# Altium PCB GPS_Proj.PcbDoc (part 1 of 2)
Units mil, origin at the board's own origin, x right, y up, seen from the top; angles counter-clockwise.
Board outline 1417.32 x 6305 mil, 4 copper layers (Top Layer, GND, VCC, Bottom Layer); 115 components, 144 nets, 456 pads, 265 vias.
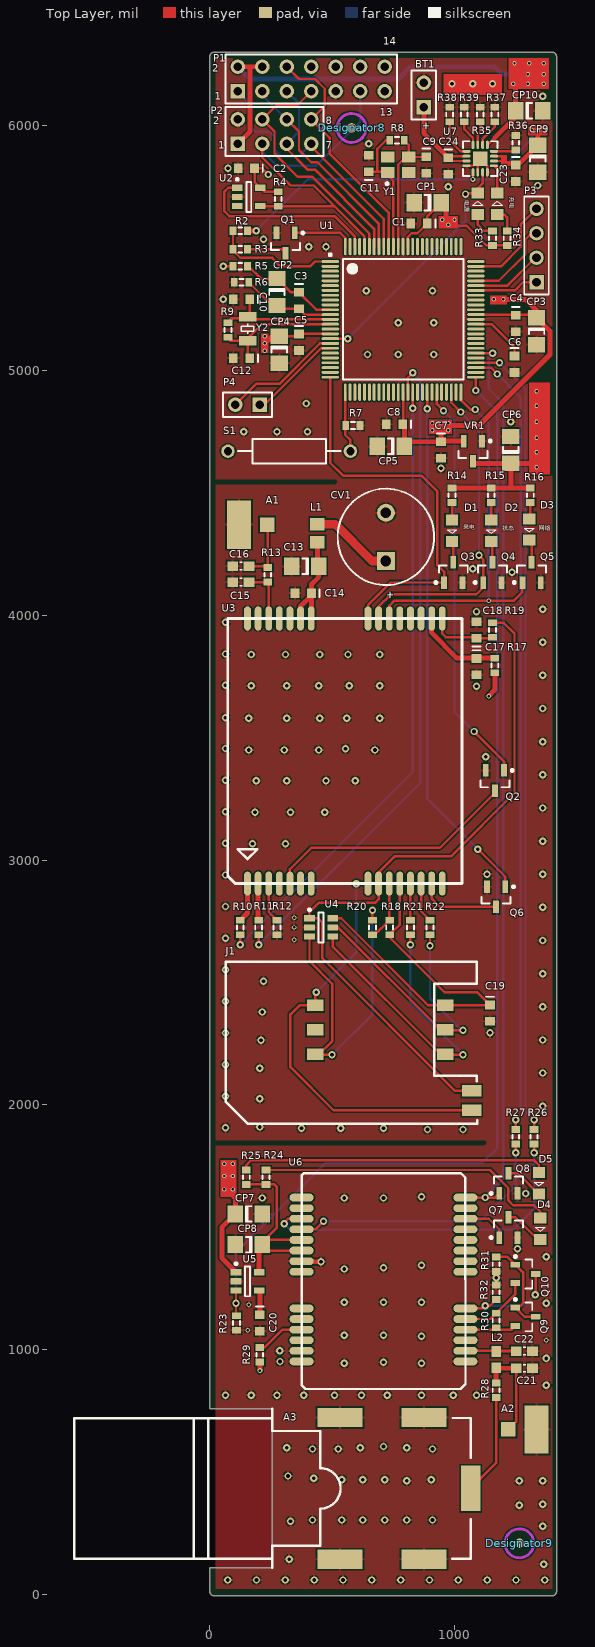
[diagram p0: Top Layer view]
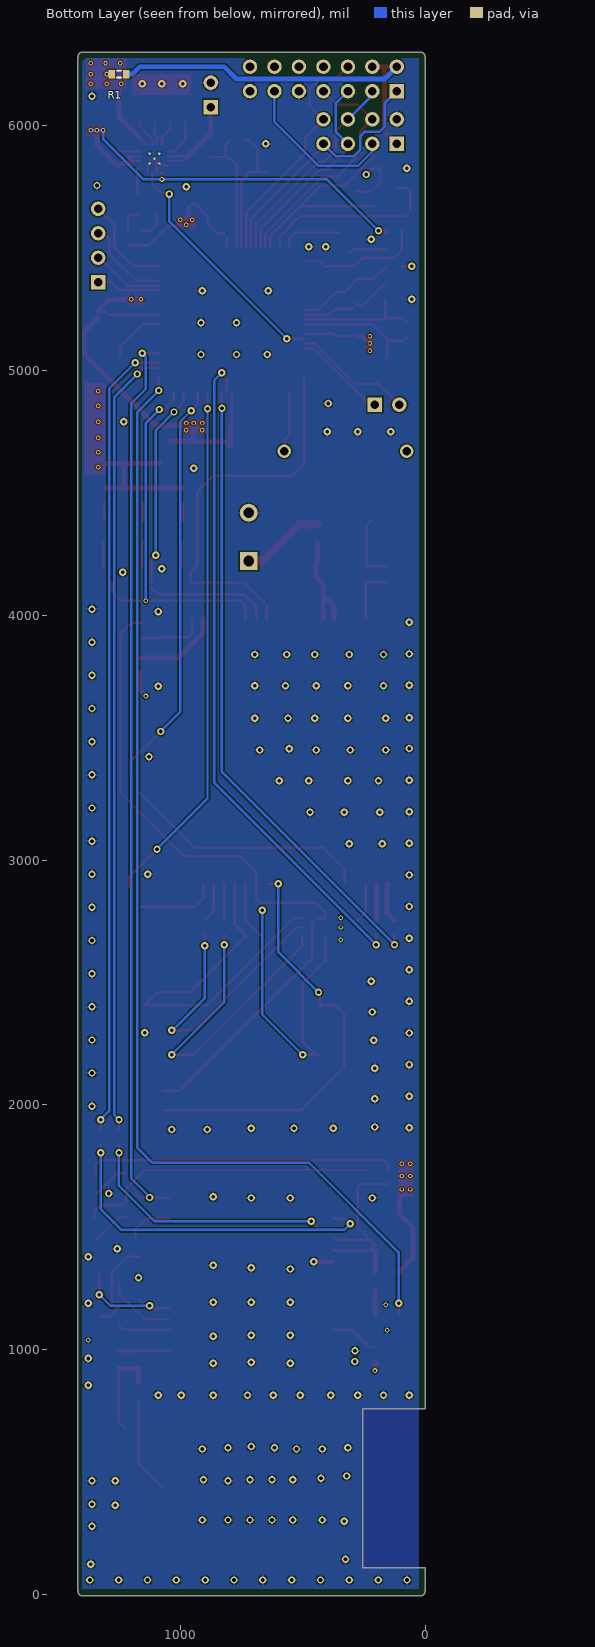
[diagram p1: Bottom Layer view, seen from below]
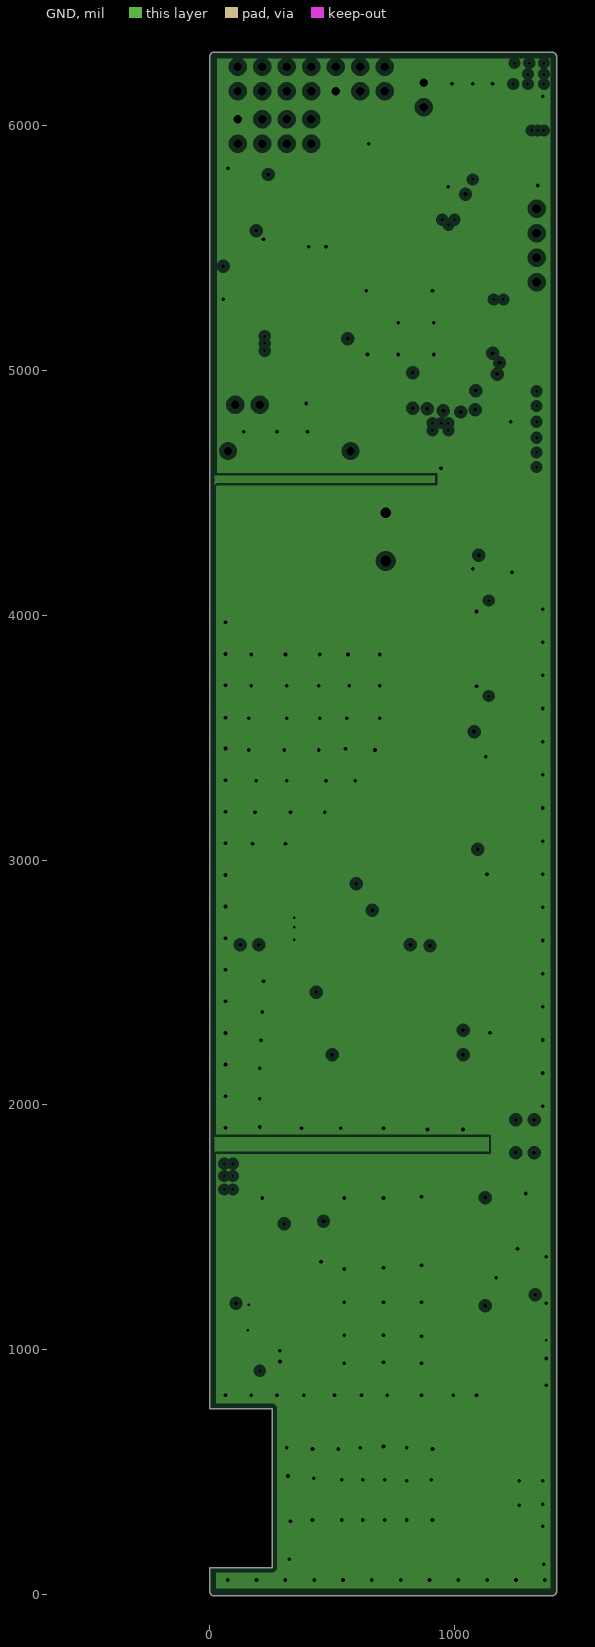
[diagram p2: GND, clearances drawn from the general rule]
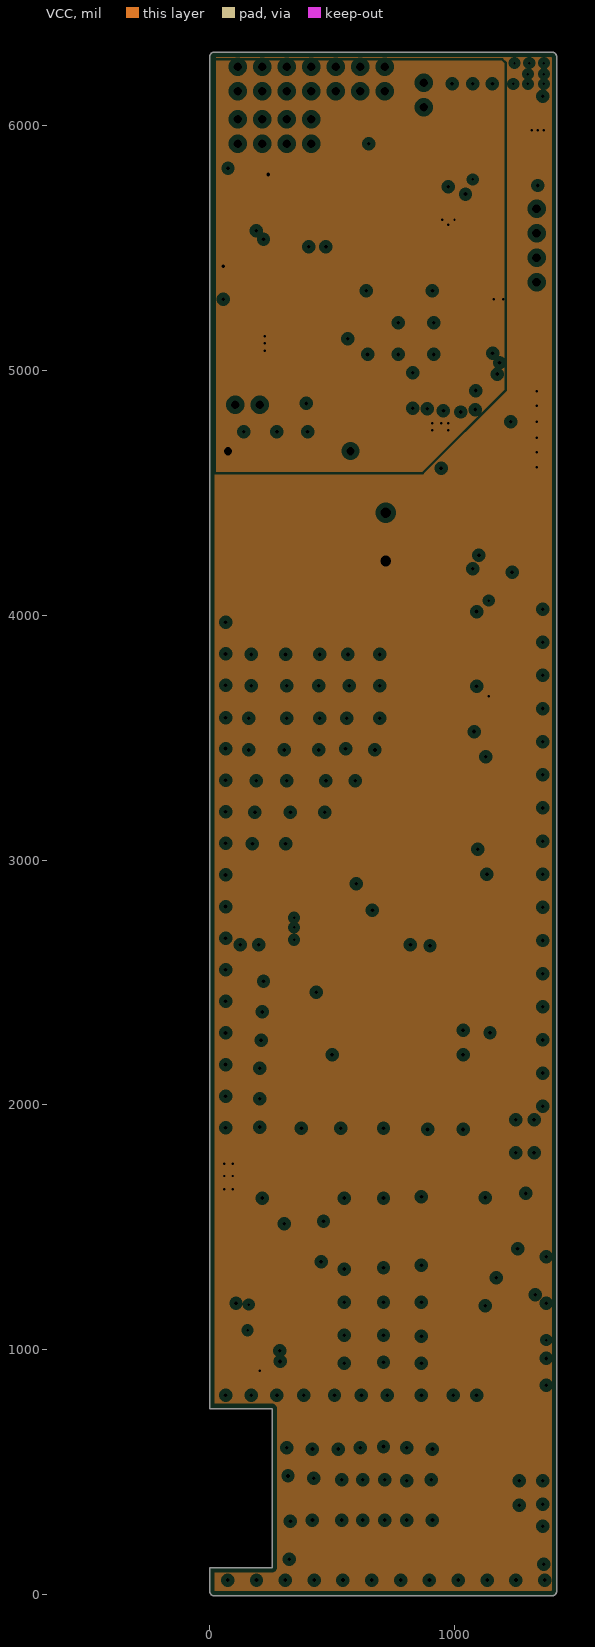
[diagram p3: VCC, clearances drawn from the general rule]
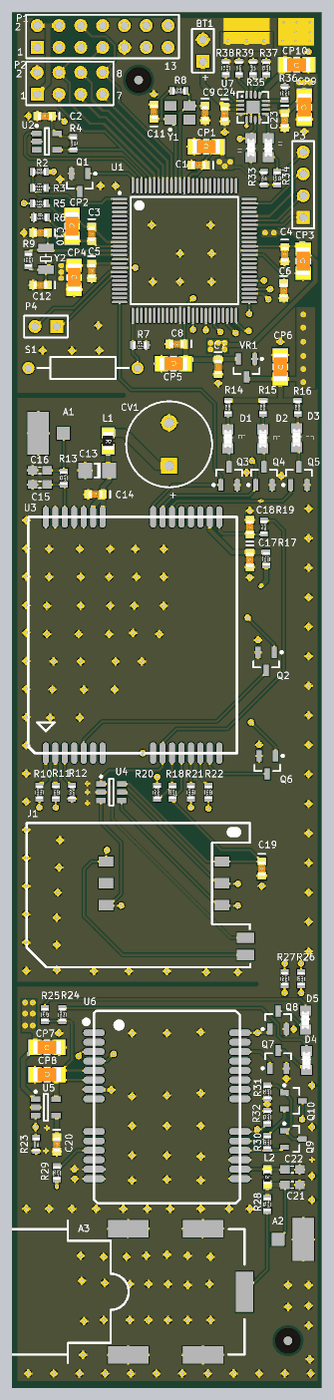
[diagram p5: 3D render of the assembled board from above, using the file's embedded part models]

## Layer stack, top to bottom
Top Layer: signal copper 1.4
Dielectric: core 12.6, FR-4, Dk 4.8
GND: plane copper 1.4, net GGND
Dielectric: prepreg 12.6, FR-4, Dk 4.8
VCC: plane copper 1.4, net (Multiple Nets)
Dielectric: core 12.6, FR-4, Dk 4.8
Bottom Layer: signal copper 1.4

## Board outline
0,15 0,110 255,110 255,760 0,760 0,6280 cw(c20,6280) 20,6300 1397.32,6300 cw(c1397.32,6280) 1417.32,6280 1417.32,15 cw(c1397.32,15) 1397.32,-5 20,-5 cw(c20,15)

## Design rules (kind name [scope] priority, off if disabled: settings)
Clearance [All] p1: gap=6
PlaneClearance [All] p1: clearance=20
PlaneConnect PlaneConnect_VAI [IsVIA] p1: planeconnectstyle=Direct reliefexpansion=20 reliefentries=4 reliefconductorwidth=10 reliefairgap=10
PlaneConnect [All] p2: planeconnectstyle=Relief reliefexpansion=20 reliefentries=4 reliefconductorwidth=10 reliefairgap=10
PolygonConnect [All] p1: connectstyle=Relief reliefconductorwidth=10 reliefentries=4 polygonreliefangle="90 Angle"
RoomDefinition 12-MSP430 [InComponentClass('12-MSP430')] p1: confinementstyle=ConfineIn formatcopy=TRUE lockcomponents=FALSE outline 5,4570 1417.32,4570 1417.32,6315 5,6315
RoomDefinition "BAT POWER" [InComponentClass('BAT POWER')] p2: confinementstyle=ConfineIn formatcopy=TRUE lockcomponents=FALSE outline 835,5420 1425,5420 1425,6300 835,6300
RoomDefinition 14-GPS [InComponentClass('14-GPS')] p3: confinementstyle=ConfineIn formatcopy=TRUE lockcomponents=FALSE outline -6.97,75 1420,75 1420,1806.69 -6.97,1806.69
RoomDefinition 13-GPRS [InComponentClass('13-GPRS')] p4: confinementstyle=ConfineIn formatcopy=TRUE lockcomponents=FALSE outline 2.32,1878.35 1417.32,1878.35 1417.32,4540 2.32,4540
RoutingVias [All] p1: holewidth=28 width=50 viastyle="Through Hole" minholewidth=10 minwidth=18 maxholewidth=28 maxwidth=50
SilkscreenOverComponentPads [All] p1: minsilkscreentomaskgap=10
SolderMaskExpansion [All] p1: expansion=4
Width [All] p1: maxlimit=100 minlimit=6 preferedwidth=20
25 further rules are at their usual default settings.

## Classes and differential pairs
component class "BAT POWER": BT1 C23 C24 CP9 CP10 R33 R34 R35 R36 R37 R38 R39 U7 充电 电源
component class 14-GPS: A2 A3 C20 C21 C22 CP7 CP8 D4 D5 L2 Q7 Q8 Q9 Q10 R23 R24 R25 R26 R27 R28 R29 R30 R31 R33 U5 U6
component class 13-GPRS: A1 C13 C14 C15 C16 C17 C18 C19 CV1 D1 D2 D3 J1 L1 Q2 Q3 Q4 Q5 Q6 R11 R12 R13 R14 R15 R16 R17 R18 R19 R20 R21 R22 R27 U3 U4
component class 12-MSP430: C1 C2 C3 C4 C5 C6 C7 C8 C9 C10 C11 C12 CP1 CP2 CP3 CP4 CP5 CP6 P1 P2 P3 P4 Q1 R2 R3 R4 R5 R6 R7 R8 R11 R27 S1 TP1 U1 U2 VR1 Y1 Y2

## Components (designator, comment, footprint, x,y, rotation, side; value= is the part's Value field where it differs from the comment)
A1 "Antenna" PIN1 235,4370 r270 top
A2 "Antenna" PIN1 1220,675 r90 top
A3 "Antenna" SL1206 255,200 r180 top
BT1 "Battery" BAT-2 875,6125 r90 top
C1 "0.1uF" 1608[0603] 855,5600 r180 top
C2 "0.1uF" 1608[0603] 150,5825 r180 top
C3 "0.1uF" 1608[0603] 365,5285 r270 top
C4 "0.1uF" 1608[0603] 1250,5191.54 r270 top
C5 "0.1uF" 1608[0603] 365,5115 r270 top
C6 "470nF" 1608[0603] 1245,5025 r270 top
C7 "0.1uF" 1608[0603] 945,4675 r270 top
C8 "0.1uF" 1608[0603] 755,4780 r180 top
C9 "15pF" 1608[0603] 885,5838.46 r270 top
C10 "15pF" 1608[0603] 130,5290 r180 top
C11 "15pF" 1608[0603] 650,5845 r90 top
C12 "15pF" 1608[0603] 130,5050 r180 top
C13 "" 1206C 390,4200 r90 top
C14 "0.1uF" 1608[0603] 382.32,4090.47 r180 top
C15 "Cap" 0603 127.32,4135.47 r270 top
C16 "Cap" 0603 127.32,4200.47 r270 top
C17 "0.1uF" 1608[0603] 1090,3790 r270 top
C18 "0.1uF" 1608[0603] 1090,3940 r90 top
C19 "0.1uF" 1608[0603] 1145,2375 r270 top
C20 "0.1uF" 1608[0603] 205,1110 r270 top
C21 "Cap" 0603 1285,925 r90 top
C22 "Cap" 0603 1285,995 r90 top
C23 "0.1uF" 1608[0603] 1250,5805 r270 top
C24 "0.1uF" 1608[0603] 975,5835 r270 top
CP1 "10uF/16V" 3216[1206] 890,5685 r180 top
CP2 "10uF/16V" 3216[1206] 275,5320 r270 top
CP3 "10uF/16V" 3216[1206] 1335,5160 r270 top
CP4 "10uF/16V" 3216[1206] 285,5085 r270 top
CP5 "10uF/16V" 3216[1206] 740,4690 r180 top
CP6 "10uF/16V" 3216[1206] 1230,4675 r90 top
CP7 "10uF/16V" 3216[1206] 160,1555 r0 top
CP8 "10uF/16V" 3216[1206] 160,1430 r180 top
CP9 "10uF/16V" 3216[1206] 1340,5865 r270 top
CP10 "10uF/16V" 3216[1206] 1305,6060 r0 top
CV1 "2200uF/10V" CAPPR5-10x20/H1.1 720,4320 r90 top
D1 "LED2" LED0805 990,4345 r270 top
D2 "LED2" LED0805 1150,4345 r270 top
D3 "LED2" LED0805 1305,4350 r270 top
D4 "LED2" LED0805 1350,1495 r270 top
D5 "LED2" LED0805 1345,1680 r270 top
Designator8 "Comment" Mark 580,5990 r180 top
Designator9 "Comment" Mark 1265,210 r180 top
J1 "MUP-C745" MUP-C745 962.32,2407.01 r270 top
L1 "Inductor" 2012[0805] 440,4335 r270 top
L2 "Inductor" 0603RT 1170,960 r90 top
P1 "Header 7X2" HDR2X7 115,6140 r0 top
P2 "Header 4X2" HDR2X4 115,5925 r0 top
P3 "Header 4" HDR1X4 1335,5360 r90 top
P4 "Header 2" HDR1X2 205,4860 r180 top
Q1 "PDTC143ET" SOT23_N 310,5520 r270 top
Q2 "PDTC143ET" SOT23_N 1165,3325 r270 top
Q3 "PDTC143ET" SOT23_N 995,4175 r90 top
Q4 "PDTC143ET" SOT23_N 1155,4175 r90 top
Q5 "PDTC143ET" SOT23_N 1315,4175 r90 top
Q6 "PDTC143ET" SOT23_N 1170,2850 r270 top
Q7 "PDTC143ET" SOT23_N 1220,1500 r90 top
Q8 "PDTC143ET" SOT23_N 1220,1680 r90 top
Q9 "MMBT3096" SOT23-PNP 1290,1135 r270 top
Q10 "MMBT3096" SOT23-PNP 1290,1310 r270 top
R1 "0R" 0603R 1250,6210 r180 bottom
R2 "100K" 0603R 125,5570 r0 top
R3 "100K" 0603R 125,5495 r180 top
R4 "470K" 0603R 280,5700 r270 top
R5 "0R" 0603R 125,5425 r0 top
R6 "0R" 0603R 130,5360 r0 top
R7 "100K" 0603R 585,4775 r0 top
R8 "10M" 0603R 765,5940 r0 top
R9 "10M" 0603R 75,5165 r90 top
R10 "0R" 0603R 125,2725 r270 top
R11 "0R" 0603R 200,2725 r270 top
R12 "0R" 0603R 275,2725 r90 top
R13 "0R" 0603R 237.32,4165.47 r90 top
R14 "10K" 0603R 990,4490 r90 top
R15 "10K" 0603R 1150,4490 r90 top
R16 "10K" 0603R 1310,4490 r90 top
R17 "1.5K" 0603R 1165,3795 r270 top
R18 "100K" 0603R 735,2725 r90 top
R19 "100K" 0603R 1155,3940 r90 top
R20 "22R" 0603R 665,2725 r90 top
R21 "22R" 0603R 820,2725 r270 top
R22 "22R" 0603R 900,2725 r270 top
R23 "470K" 0603R 110,1110 r270 top
R24 "10K" 0603R 230,1705 r270 top
R25 "10K" 0603R 150,1705 r270 top
R26 "0R" 0603R 1325,1870 r90 top
R27 "0R" 0603R 1250,1870 r90 top
R28 "0R" 0603R 1170,835 r90 top
R29 "0R" 0603R 205,980 r90 top
R30 "10R" 0603R 1170,1120 r90 top
R31 "47K" 0603R 1170,1350 r90 top
R32 "200K" 0603R 1170,1235 r90 top
R33 "10K" 0603R 1155,5540 r270 top
R34 "10K" 0603R 1215,5540 r270 top
R35 "2K" 0603R 1105,6045 r270 top
R36 "1K1" 0603R 1250,5930 r90 top
R37 "51K" 0603R 1165,6045 r90 top
R38 "10K" 0603R 980,6045 r90 top
R39 "680R" 0603R 1040,6045 r90 top
S1 "SW-420" AXIAL-0.5 325,4670 r180 top
U1 "MSP430F5438" TQFP100_N 790,5208.35 r0 top
U2 "MAX6869" SOT23-5BN 160,5708.46 r0 top
U3 "M72-D" M72D 552.32,3445.47 r90 top
U4 "SMF05CT1G" SOT23-6_N 455,2725 r0 top
U5 "LTC1844ES5-3.3" SOT-23-OT5_N 155,1280 r0 top
U6 "EB-5662RE" EB-5662RE 710,1305 r180 top
U7 "BQ24073" BQ24073 1105,5865 r0 top
VR1 "AS1360" SOT23_N 1075,4670 r270 top
Y1 "FA-238" FA-238 770,5840 r0 top
Y2 "FC-135" FC-135 155,5170 r90 top
充电 "LED2" LED0805 1175,5680 r90 top (schematic designator D7)
电源 "LED2" LED0805 1095,5680 r90 top (schematic designator D6)

## Footprints (in the part's own frame and the unit in brackets; to place one, negate y for a bottom-side part, rotate by r counter-clockwise, add the part's x,y. Pads: shape width x height; smd on the part's side, far side on the other; paste and mask are expansions set on the pad)
0603 [mm]
  rect 1x1.1 smd: 1(0,-0.85) 2(0,0.85)
  silkscreen extent -0.38,-0.13 0.38,0.13
0603R [mm]
  rect 0.7x0.9 smd: 1(-0.75,0) 2(0.75,0)
  silkscreen extent -0.2,-0.35 0.2,0.35, body extent -0.77,-0.42 0.78,0.43, height 0.45
0603RT [mm]
  rect 1.1x1 smd: 1(-0.85,0) 2(0.85,0)
  body extent -1.3,-0.5 1.3,0.5, height 0.53
1206C [mm]
  rect 1.8x1.6 smd: 1(0,-1.4) 2(0,1.4)
  silkscreen extent -0.8,-0.3 0.8,0.3
1608[0603] [mm]
  rect 0.9x1 smd: 1(-0.85,0) 2(0.85,0)
  silkscreen extent -1.7,-0.4 -1.7,0.4, body extent -1.3,-0.5 1.3,0.5, height 0.89
2012[0805] [mm]
  rect 1.3x1.5 smd: 1(-0.95,0) 2(0.95,0)
  body extent -1.51,-0.7 1.49,0.7, height 0.53
3216[1206] [mm]
  rect 1.6x1.8 smd: 1(-1.4,0) 2(1.4,0)
  silkscreen extent -0.3,-0.8 0.3,0.8, body extent -2.1,-0.9 2.1,0.9, height 0.95
AXIAL-0.5 [mm] "Axial Device, Thru-Hole; 2 Leads; 0.5 in Pin Spacing"
  round 1.4 hole 0.85: 1(-6.35,0) 2(6.35,0)
  silkscreen extent -5.33,-1.27 5.33,1.27
BAT-2 [mm]
  rect 1.5x1.5 hole 0.9: 1(-1.27,0)
  round 1.5 hole 0.9: 2(1.27,0)
  silkscreen extent -2.54,-1.27 2.54,1.27
BQ24073 [mm]
  oval 0.85x0.3 smd: 1(-1.425,0.75) 2(-1.425,0.25) 3(-1.425,-0.25) 4(-1.425,-0.75) 9(1.425,-0.75) 10(1.425,-0.25) 11(1.425,0.25) 12(1.425,0.75)
  oval 0.3x0.85 smd: 5(-0.75,-1.425) 6(-0.25,-1.425) 7(0.25,-1.425) 8(0.75,-1.425) 13(0.75,1.425) 14(0.25,1.425) 15(-0.25,1.425) 16(-0.75,1.425)
  round 0.25 all layers, no hole: 8(-0.508,-0.508) 8(-0.508,0.508) 8(0,0) 8(0.508,-0.508) 8(0.508,0.508)
  rect 1.5x1.5 smd: 8(0,0)
  round 0.3 on Top Overlay: 12(-1.27,1.27)
  silkscreen extent -1.8,-1.8 1.8,1.8
CAPPR5-10x20/H1.1 [mm] "Capacitor, Electrolytic, Radial; Body 10 x 20 mm (Dia.xH typ); Pin Spacing 5 mm (typ)"
  rect 1.85x1.85 hole 1.1: 1(-2.5,0)
  round 1.85 hole 1.1: 2(2.5,0)
  silkscreen extent -5,-5 5,5
EB-5662RE [mm]
  oval 2.5x0.8 smd: 1(8.5,-8.051) 2(8.5,-6.951) 3(8.5,-5.851) 4(8.5,-4.751) 5(8.5,-3.651) 6(8.5,-2.551) 7(8.5,-1.451) 8(8.5,-0.351) 9(8.5,3.449) 10(8.5,4.549) 11(8.5,5.649) 12(8.5,6.749) 13(8.5,7.849) 14(8.5,8.949) 15(-8.5,8.949) 16(-8.5,7.849) 17(-8.5,6.749) 18(-8.5,5.649) 19(-8.5,4.549) 20(-8.5,3.449) 21(-8.5,-0.351) 22(-8.5,-1.451) 23(-8.5,-2.551) 24(-8.5,-3.651) 25(-8.5,-4.751) 26(-8.5,-5.851) 27(-8.5,-6.951) 28(-8.5,-8.051)
  round 1.3 on Top Overlay: 3(5.588,-8.949)
  round 1 on Top Overlay: ""(9.398,-9.33)
  silkscreen extent -8.51,-10.59 8.5,11.81
FA-238 [mm] "Quartz Crystal, SM; Body 3.4 x 2.7 mm (LxW max)"
  rect 1.4x1.15 smd: 1(-1.1,-0.8) 2(1.1,-0.8) 3(1.1,0.8) 4(-1.1,0.8)
  silkscreen extent -1.27,-2.09 -1.02,-1.84
FC-135 [mm] "Quartz Crystal, SM; 2 Leads; Body 3.5 x 1.5 x 0.8mm (LxWxH)"
  rect 1x1.8 smd: 1(-1.25,0) 2(1.25,0)
  silkscreen extent -0.51,-0.64 0.51,0.64
HDR1X2 [mm] "Connector; Header; 2 Position"
  rect 1.5x1.5 hole 0.9: 1(0,0)
  round 1.5 hole 0.9: 2(2.54,0)
  silkscreen extent -1.27,-1.27 3.81,1.27
HDR1X4 [mm] "Connector; Header; 4 Position"
  rect 1.5x1.5 hole 0.9: 1(0,0)
  round 1.5 hole 0.9: 2(2.54,0) 3(5.08,0) 4(7.62,0)
  silkscreen extent -1.27,-1.27 8.89,1.27
HDR2X4 [mm] "Connector; Header; 4x2 Position"
  rect 1.5x1.5 hole 0.9: 1(0,0)
  round 1.5 hole 0.9: 2(0,2.54) 3(2.54,0) 4(2.54,2.54) 5(5.08,0) 6(5.08,2.54) 7(7.62,0) 8(7.62,2.54)
  silkscreen extent -1.27,-1.27 8.89,3.81
HDR2X7 [mm] "Connector; Header; 7x2 Position"
  rect 1.5x1.5 hole 0.9: 1(0,0)
  round 1.5 hole 0.9: 2(0,2.54) 3(2.54,0) 4(2.54,2.54) 5(5.08,0) 6(5.08,2.54) 7(7.62,0) 8(7.62,2.54) 9(10.16,0) 10(10.16,2.54) 11(12.7,0) 12(12.7,2.54) 13(15.24,0) 14(15.24,2.54)
  silkscreen extent -1.27,-1.27 16.51,3.81
LED0805 [mil]
  rect 45x50 smd: 1(-43.5,0) 2(43.5,0)
  silkscreen extent -5,-20 10,20, body extent -41,-18 41,18, height 33
M72D [mm]
  oval 2.5x0.7 smd: 1(-13.75,10.1) 2(-13.75,9) 3(-13.75,7.9) 4(-13.75,6.8) 5(-13.75,5.7) 6(-13.75,4.6) 7(-13.75,3.5) 8(-13.75,-2.4) 9(-13.75,-3.5) 10(-13.75,-4.6) 11(-13.75,-5.7) 12(-13.75,-6.8) 13(-13.75,-7.9) 14(-13.75,-9) 15(-13.75,-10.1) 16(13.75,-10.1) 17(13.75,-9) 18(13.75,-7.9) 19(13.75,-6.8) 20(13.75,-5.7) 21(13.75,-4.6) 22(13.75,-3.5) 23(13.75,-2.4) 24(13.75,3.5) 25(13.75,4.6) 26(13.75,5.7) 27(13.75,6.8) 28(13.75,7.9) 29(13.75,9) 30(13.75,10.1)
  silkscreen extent -13.75,-12.15 13.75,12.15
Mark [mm]
  round 1 smd paste+0 mask+1: 1(0,0)
  Top Layer keep-out circle w0.3: c0,0 r1.5
MUP-C745 [mm]
  rect 1.2x1.7 smd: 1(0,0) 2(2.54,0) 3(5.08,0) 5(0,-13.5) 6(2.54,-13.5) 7(5.08,-13.5)
  oval 1.2x1.7 on Top Overlay: 3(-3.429,1.397)
  rect 1.2x2 smd: 4(8.88,2.75) 8(10.88,2.75)
  silkscreen extent -4.5,-22.75 12.3,3.3
PIN1 [mm]
  rect 1.5x1.5 smd: 1(0,0)
  rect 5x2.5 smd: 2(0,-2.921)
SL1206 [mm]
  rect 2x4.7 smd: 1(-20.6,-5.95)
  rect 4.7x2 smd: 2(-15.75,1.4) 2(-15.75,-13.3) 2(-7.05,1.4) 2(-7.05,-13.3)
  silkscreen extent -20.6,-14.2 20.54,2.31
SOT23-5BN [mm] "SOT23, 5-Leads, Body 2.9x1.6mm, Pitch 0.95mm, Lead Span 2.8mm, IPC Medium Density"
  rect 1.1x0.65 smd: 1(-1.2,0.95) 2(-1.2,0) 3(-1.2,-0.95) 4(1.2,-0.95) 5(1.2,0.95)
  silkscreen extent -1.32,-1.55 0.25,1.95, body extent -0.9,-1.55 0.9,1.55, height 1.19
SOT23-6_N [mm] "SOT23, 6-Leads, Body 2.9x1.6mm, Pitch 0.95mm, Lead Span 2.7mm, IPC Medium Density"
  rect 1.1x0.65 smd: 1(-1.2,0.95) 2(-1.2,0) 3(-1.2,-0.95) 4(1.2,-0.95) 5(1.2,0) 6(1.2,0.95)
  silkscreen extent -1.32,-1.55 0.25,1.95, body extent -0.9,-1.55 0.9,1.55, height 1.45
SOT23-PNP [mm]
  rect 0.6x1 smd: 1(-0.95,-1.05) 2(0.95,-1.05) 3(0,1.05)
  silkscreen extent -1.92,-1.17 1.5,0.7
SOT23_N [mm] "SOT23, 3-Leads, Body 2.9x1.3mm, Pitch 0.95mm, Lead Span 2.3mm, IPC Medium Density"
  rect 1.3x0.6 smd: 1(-1.05,0.95) 2(-1.05,-0.95) 3(1.05,0)
  silkscreen extent -1.17,-1.5 0.7,1.93, body extent -0.7,-1.5 0.7,1.5, height 1.1
SOT-23-OT5_N [mm] "SOT23, 5-Leads, Body 2.9x1.6mm, Pitch 0.95mm, Lead Span 2.7"
  rect 1.1x0.65 smd: 1(-1.2,0.95) 2(-1.2,0) 3(-1.2,-0.95) 4(1.2,-0.95) 5(1.2,0.95)
  silkscreen extent -1.32,-1.55 0.25,1.95, body extent -0.9,-1.55 0.9,1.55, height 1.45
TQFP100_N [mm] "Thin QFP, 100-Leads, Body 14x14mm, Pitch 0.5mm, IPC Medium Density"
  oval 1.8x0.3 smd: 1(-7.55,6) 2(-7.55,5.5) 3(-7.55,5) 4(-7.55,4.5) 5(-7.55,4) 6(-7.55,3.5) 7(-7.55,3) 8(-7.55,2.5) 9(-7.55,2) 10(-7.55,1.5) 11(-7.55,1) 12(-7.55,0.5) 13(-7.55,0) 14(-7.55,-0.5) 15(-7.55,-1) 16(-7.55,-1.5) 17(-7.55,-2) 18(-7.55,-2.5) 19(-7.55,-3) 20(-7.55,-3.5) 21(-7.55,-4) 22(-7.55,-4.5) 23(-7.55,-5) 24(-7.55,-5.5) 25(-7.55,-6) 51(7.55,-6) 52(7.55,-5.5) 53(7.55,-5) 54(7.55,-4.5) 55(7.55,-4) 56(7.55,-3.5) 57(7.55,-3) 58(7.55,-2.5) 59(7.55,-2) 60(7.55,-1.5) 61(7.55,-1) 62(7.55,-0.5) 63(7.55,0) 64(7.55,0.5) 65(7.55,1) 66(7.55,1.5) 67(7.55,2) 68(7.55,2.5) 69(7.55,3) 70(7.55,3.5) 71(7.55,4) 72(7.55,4.5) 73(7.55,5) 74(7.55,5.5) 75(7.55,6)
  oval 0.3x1.8 smd: 26(-6,-7.55) 27(-5.5,-7.55) 28(-5,-7.55) 29(-4.5,-7.55) 30(-4,-7.55) 31(-3.5,-7.55) 32(-3,-7.55) 33(-2.5,-7.55) 34(-2,-7.55) 35(-1.5,-7.55) 36(-1,-7.55) 37(-0.5,-7.55) 38(0,-7.55) 39(0.5,-7.55) 40(1,-7.55) 41(1.5,-7.55) 42(2,-7.55) 43(2.5,-7.55) 44(3,-7.55) 45(3.5,-7.55) 46(4,-7.55) 47(4.5,-7.55) 48(5,-7.55) 49(5.5,-7.55) 50(6,-7.55) 76(6,7.55) 77(5.5,7.55) 78(5,7.55) 79(4.5,7.55) 80(4,7.55) 81(3.5,7.55) 82(3,7.55) 83(2.5,7.55) 84(2,7.55) 85(1.5,7.55) 86(1,7.55) 87(0.5,7.55) 88(0,7.55) 89(-0.5,7.55) 90(-1,7.55) 91(-1.5,7.55) 92(-2,7.55) 93(-2.5,7.55) 94(-3,7.55) 95(-3.5,7.55) 96(-4,7.55) 97(-4.5,7.55) 98(-5,7.55) 99(-5.5,7.55) 100(-6,7.55)
  silkscreen extent -7.67,-6.25 6.25,6.82, body extent -7,-7 7,7, height 1.2

## Part data
A1 A2 A3: "Generic Antenna"
BT1: "Multicell Battery"
C1 C2 C3 C4 C5 C6 C7 C8 C9 C10 C11 C12 C14 C17 C18 C19 C20 C23 C24: library part CAP, "Capacitor"
C13: library part "Cap Pol2", "Polarized Capacitor (Axial)"
C15 C16 C21 C22: "Capacitor"
CP1 CP2 CP3 CP4 CP5 CP6 CP7 CP8 CP9 CP10: library part CAPACITOR, "Tantalum Capacitor"
CV1: library part ELECTRO1, "aluminum electrolytic capacitor"
D1 D2 D3 D4 D5 充电 电源: "Typical RED, GREEN, YELLOW, AMBER GaAs LED"
J1: library part SIMCARD, "CON"
P1: "Header, 7-Pin, Dual row"
P2: "Header, 4-Pin, Dual row"
P3: "Header, 4-Pin"
P4: "Header, 2-Pin"
Q1 Q2 Q3 Q4 Q5 Q6 Q7 Q8: "NPN Resistor-equipped Transistor"
R1 R2 R3 R4 R5 R6 R7 R8 R9 R10 R11 R12 R13 R14 R15 R16 R17 R18 R19 R20 R21 R22 R23 R24 R25 R26 R27 R28 R29 R30 R31 R32 R33 R34 R35 R36 R37 R38 R39: library part RES, "RES"
S1: library part "Header 2", "Header, 2-Pin"
U2: "POWER"
U3: "GSM"
U4: "ESD"
U5: library part LT1761, "电源管理"
U6: "GPS"
VR1: library part "Volt Reg", "Voltage Regulator"
Y1 Y2: library part XTAL, "Crystal Oscillator"

## Via types
v1: diameter 30, hole 15, Top Layer to Bottom Layer, 219 vias
v2: diameter 18, hole 10, Top Layer to Bottom Layer, 43 vias
v3: diameter 20, hole 10, Top Layer to Bottom Layer, 3 vias

## Nets (pads, with @x,y where several pads share a name; then routed paths per layer and width w, separated by ;. In a path a pad name is that pad's centre, name@x,y a point inside that pad or via, vN(x,y) a via of type N, cw(c..) or ccw(c..) an arc to the next point about the centre after c; other vN are vias at no path point)
ANT: C15.2 R13.1 U3.28 | length 227.8
  Top Layer w10: C15.2@160.79,4135.47 R13.1@237.79,4135.47 ; R13.1@237.32,4135.94 R13.1@237.79,4135.47 ; U3.28@241.3,3986.81 241.3,4131.97 R13.1@237.79,4135.47
ANT_DET: Q10.3 R32.1 U6.20 | length 449.6
  Top Layer w10: U6.20@1044.65,1169.21 1114.21,1169.21 v1(1125,1180) 1144.53,1180 R32.1@1170,1205.47 ; v1(1330,1225) 1331.34,1226.34 Q10.3@1331.34,1310
  Bottom Layer w10: v1(1125,1180) 1285,1180 v1(1330,1225)
BAT: BT1.1 C24.1 U7.2 U7.3 | length 403.9
  Top Layer w10: U7.3@1048.9,5855.16 988.31,5855.16 C24.1@975,5868.46 981.38,5874.84 U7.2@1048.9,5874.84
  Top Layer w20: BT1.1@875,6075 875,5968.46 C24.1@975,5868.46
BSL_RX: P4.1 U1.19 | length 383.1
  Top Layer w10: P4.1@205,4860 225,4860 455.24,5090.24 U1.19@492.76,5090.24
BSL_TX: P4.2 U1.18 | length 491.3
  Top Layer w10: P4.2@105,4860 190,4945 285,4945 449.92,5109.92 U1.18@492.76,5109.92
C\H\G\: U7.9 充电.2 | length 117.7
  Top Layer w10: U7.9@1161.1,5835.47 1175,5821.57 充电.2@1175,5723.5
DTR: Q2.3 U3.5 | length 1025.1
  Top Layer w10: U3.5@327.91,2904.13 327.91,2962.91 415,3050 940,3050 Q2.3@1165,3275
EMERG_OFF: U3.15
GGND: A1.2 A2.2 A3.2 BT1.2 C1.2 C2.2 C4.2 C5.2 C6.2 C7.2 C8.2 C9.2 C10.2 C11.2 C12.2 C13.2 C14.2 C15.1 C16.1 C17.2 C18.2 C19.2 C20.2 C21.1 C22.1 C23.2 C24.2 CP1.2 CP3.2 CP4.2 CP5.2 CP6.2 CP7.2 CP8.2 CP9.2 CP10.2 CV1.2 P1.9 P2.2 Q1.2 Q2.2 Q3.2 Q4.2 Q5.2 Q6.2 Q7.2 Q8.2 R6.1 R7.2 R12.1 R23.2 R31.1 R32.2 R35.1 R36.2 R37.2 R38.2 R39.2 U1.15 U1.37 U1.63 U1.88 U2.2 U3.26 U3.27 U3.29 U3.30 U4.2 U5.2 U6.7 U6.13 U6.14 U6.15 U6.17 U7.4 U7.6 U7.8 VR1.1 | length 260.4
  Top Layer w10: U7.4@1048.9,5835.47 1050.06,5836.63 1076.63,5836.63 U7.8@1085,5845 U7.8@1095.16,5855.16 ; U7.6@1095.16,5808.9 U7.8@1095.16,5855.16 ; U7.8@1134.53,5808.9 1133.37,5810.06 1133.37,5836.63 U7.8@1125,5845 U7.8@1105,5865 U7.8@1095.16,5855.16
  Top Layer w20: U6.7@377.48,1360 v1(455,1360)
  other v1: 73.64,60 191.36,60 309.09,60 426.82,60 544.55,60 662.27,60 780,60 897.73,60 1015.45,60 1133.18,60 1250.91,60 1368.64,60 1365,125 325,145 1360,280 330,300 420,305 540,305 625,305 715,305 805,305 910,305 1265,365 1360,370 805,465 1265,465 1360,465 540,470 625,470 715,470 905,470 425,475 320,485 420,595 525,595 910,595 315,600 615,600 805,600 710,605 65,815 170,815 275,815 385,815 510,815 620,815 725,815 865,815 995,815 1090,815 1375,855 550,945 865,945 710,950 287.68,952.68 1375,965 285.98,995.98 865,1055 550,1060 710,1060 1375,1190 550,1195 710,1195 865,1195 1170,1295 550,1330 710,1335 865,1345 1375,1380 1257.4,1412.6 215.12,1619.88 550,1620 710,1620 865,1625 1291.34,1638.66 890,1900 1035,1900 375,1905 535,1905 710,1905 65,1906.88 205,1910 1360,1995 205,2025 65,2035.94 1360,2130.33 205,2150 65,2165 210,2265 1360,2265.67 65,2294.06 1145,2295 215,2380 1360,2401 65,2423.12 220,2505 1360,2536.33 65,2552.19 1360,2671.67 65,2681.25 1360,2807 65,2810.31 65,2939.38 1360,2942.33 1132.6,2942.6 175,3066.56 310,3066.56 65,3068.44 1360,3077.67 185,3195.62 330,3195.62 470,3195.62 65,3197.5 1360,3213 190,3324.69 315,3324.69 475,3324.69 595,3324.69 65,3326.56 1360,3348.33 1127.6,3422.4 160,3450 305,3450 445,3450 675,3450 555,3455 65,3455.62 1360,3483.67 160,3580 315,3580 450,3580 560,3580 695,3580 65,3581.88 1360,3619 1090,3710 170,3711.88 315,3711.88 445,3711.88 570,3711.88 695,3711.88 65,3713.75 1360,3754.33 170,3840 310,3840 450,3840 565,3840 695,3840 65,3841.88 1360,3889.67 65,3971.88 1090,4015 1360,4025 1235,4175 1075,4190 945,4600 140,4750 275,4750 400,4750 1230,4790 395,4865 645,5065 770,5065 915,5065 770,5195 915,5195 55,5290 640,5325 910,5325 405,5505 475,5505 220,5535 975,5750 1340,5755 75,5825 650,5925 1360.12,6120.12 990,6170 1075,6170 1155,6170
  other v2: 1375,1040 155,1080 160,1185 345,2675 345,2725 345,2765
GPRS_DTR: Q2.1 U1.45 | length 1658.5
  Top Layer w10: U1.45@927.8,4911.1 927.8,4862.2 v1(955,4835) ; v1(1080,3525) 1202.4,3402.6 Q2.1@1202.4,3366.34
  Bottom Layer w10: v1(955,4835) 1000,4790 1000,3605 v1(1080,3525)
GPRS_PWR: Q6.1 U1.43 | length 2151.9
  Top Layer w10: v1(888.43,4843.43) U1.43@888.43,4911.1 ; v1(1095,3045) 1207.4,2932.6 Q6.1@1207.4,2891.34
  Bottom Layer w10: v1(888.43,4843.43) 888.43,3251.57 v1(1095,3045)
GPS_PWR: R23.1 U1.51 U5.3 | length 4739.4
  Top Layer w10: U5.3@107.76,1242.6 v1(107.76,1190) 107.76,1141.77 R23.1@110,1139.53 ; v1(1087.24,4917.76) U1.51@1087.24,4972.13
  Bottom Layer w10: v1(107.76,1190) 107.76,1397.76 475,1765 1115,1765 1175,1825 1175,4790 1175,4830 v1(1087.24,4917.76)
MRST: P1.11 P2.3 R4.2 U1.96 U2.4 | length 1605.8
  Top Layer w10: U2.4@207.24,5671.06 207.83,5670.47 R4.2@280,5670.47 279.41,5671.06 508.94,5671.06 ; P2.3@215,5925 215,5870 330,5755 425,5755 508.94,5671.06 ; U1.96@632.52,5505.59 632.52,5547.48 508.94,5671.06
  Bottom Layer w10: P2.3@215,5925 215,5895 275,5835 435,5835 615,6015 P1.11@615,6140
MTCK: P1.7 P2.4 U1.95 | length 983.3
  Top Layer w10: P1.7@415,6140 360,6085 275,6085 P2.4@215,6025 265,5975 265,5885 360,5790 420,5790 652.2,5557.8 U1.95@652.2,5505.59
MTDI: P1.3 P2.6 U1.93 | length 846.5
  Top Layer w10: P2.6@315,6025 365,5975 365,5900 415,5850 440,5850 691.57,5598.43 U1.93@691.57,5505.59
  Bottom Layer w10: P1.3@215,6140 215,6125 P2.6@315,6025
MTDO: P1.1 P2.7 U1.92 | length 1060.5
  Top Layer w10: P2.7@415,5925 415,5915 711.26,5618.74 U1.92@711.26,5505.59
  Bottom Layer w10: P1.1@115,6140 165,6090 165,5995 185,5975 245,5975 265,5955 265,5900 290,5875 365,5875 P2.7@415,5925
MTEST: P1.6 P2.8 U1.91 | length 990.3
  Top Layer w10: P1.6@315,6240 365,6190 430,6190 470,6150 470,6080 P2.8@415,6025 490,5950 490,5885 730.94,5644.06 U1.91@730.94,5505.59
MTMS: P1.5 P2.5 U1.94 | length 851.2
  Top Layer w10: P2.5@325,5925 P2.5@315,5925 315,5905 400,5820 430,5820 671.89,5578.11 U1.94@671.89,5505.59
  Bottom Layer w10: P2.5@315,5925 365,5975 365,6090 P1.5@315,6140
NetA1_1: A1.1 C16.2 R13.2 | length 281.7
  Top Layer w10: C16.2@160.79,4200.47 231.85,4200.47 R13.2@237.32,4195 237.32,4367.68 A1.1@215.93,4389.07
NetA2_1: A2.1 C21.2 L2.1 R28.2 | length 407.2
  Top Layer w10: L2.1@1170,926.54 L2.1@1171.54,925 ; A2.1@1220,675 1251.54,706.54 1251.54,736.54 C21.2@1251.54,925
  Top Layer w20: R28.2@1170,864.53 L2.1@1170,926.54 ; L2.1@1171.54,925 C21.2@1251.54,925
NetA3_1: A3.1 R28.1 | length 404.3
  Top Layer w10: A3.1@1066.02,434.25 1170,538.23 R28.1@1170,795.47
NetC3_2: C3.2 CP2.2 R6.2 U1.12 | length 392
  Top Layer w10: R6.2@159.53,5360 254.65,5264.88 CP2.2@275,5264.88 ; CP2.2@275,5274.88 298.35,5251.54 C3.2@365,5251.54 388.5,5228.03 U1.12@492.76,5228.03
NetC6_1: C6.1 U1.62 | length 233.1
  Top Layer w10: U1.62@1087.24,5188.66 1151.34,5188.66 1245,5095 C6.1@1245,5058.46
NetC17_1: C17.1 R17.1 U3.17 | length 359.6
  Top Layer w20: U3.17@906.65,3986.81 906.65,3928.35 1010,3825 R17.1@1165,3825
NetC20_1: C20.1 U5.4 | length 100.3
  Top Layer w20: U5.4@202.24,1242.6 205,1239.84 C20.1@205,1143.46
NetC22_2: C22.2 L2.2 U6.16 | length 288.6
  Top Layer w10: U6.16@1044.65,995.98 1247.48,995.98 C22.2@1250,993.46 ; L2.2@1170,993.46 C22.2@1250,993.46 ; C22.2@1251.54,995 C22.2@1250,993.46
NetD1_1: D1.1 R14.1 | length 72
  Top Layer w10: D1.1@990,4388.5 R14.1@990,4460.47
NetD1_2: D1.2 Q3.3 | length 107.2
  Top Layer w10: D1.2@990,4301.5 995,4296.5 Q3.3@995,4196.34
NetD2_1: D2.1 R15.1 | length 72
  Top Layer w10: D2.1@1150,4388.5 R15.1@1150,4460.47
NetD2_2: D2.2 Q4.3 | length 107.2
  Top Layer w10: D2.2@1150,4301.5 1155,4296.5 Q4.3@1155,4196.34
NetD3_1: D3.1 R16.1 | length 69
  Top Layer w10: D3.1@1305,4393.5 1310,4398.5 R16.1@1310,4460.47
NetD3_2: D3.2 Q5.3 | length 114.3
  Top Layer w10: D3.2@1305,4306.5 1315,4296.5 Q5.3@1315,4196.34
NetD4_1: D4.1 R24.1 | length 1246
  Top Layer w10: R24.1@230,1734.53 1145.47,1734.53 1220,1660 1220,1610 1240,1590 1325,1590 1350,1565 D4.1@1350,1538.5
NetD4_2: D4.2 Q7.3 | length 157.8
  Top Layer w10: Q7.3@1220,1541.34 1248.66,1541.34 D4.2@1340,1450
NetD5_1: D5.1 R25.1 | length 1263.5
  Top Layer w10: R25.1@150,1734.53 150,1755 170,1775 1325,1775 1345,1755 D5.1@1345,1723.5
NetD5_2: D5.2 Q8.3 | length 160.1
  Top Layer w10: Q8.3@1220,1721.34 1258.66,1721.34 1343.5,1636.5 D5.2@1345,1636.5
NetD6_1: R33.1 电源.1 | length 112
  Top Layer w10: 电源.1@1095,5636.5 1095,5595 1120.47,5569.53 R33.1@1155,5569.53
NetD7_1: R34.1 充电.1 | length 100.2
  Top Layer w10: 充电.1@1175,5636.5 1203.5,5636.5 1215,5625 R34.1@1215,5569.53
NetJ1_2: J1.2 R22.2 U4.5 | length 1189.5
  Top Layer w10: U4.5@502.24,2725 525,2725 J1.2@942.99,2307.01 ; R22.2@895,2690.47 R22.2@900,2695.47 v1(900,2650) ; J1.2@962.32,2307.01 J1.2@942.99,2307.01 ; v1(1035,2305) 945,2305 J1.2@942.99,2307.01
  Bottom Layer w10: v1(900,2650) 900,2435 1035,2300 v1(1035,2305)
NetJ1_3: J1.3@962.32,2207.01 R21.2 U4.4 | length 1335.5
  Top Layer w10: U4.4@502.24,2687.6 502.24,2647.76 942.99,2207.01 J1.3@962.32,2207.01 964.33,2205 v1(1035,2205) ; v1(820,2655) R21.2@820,2695.47
  Bottom Layer w10: v1(820,2655) 820,2420 v1(1035,2205)
NetJ1_7: J1.7 R20.2 U4.3 | length 1329.1
  Top Layer w10: U4.3@405.35,2690 U4.3@407.76,2687.6 407.76,2587.24 500,2495 500,2260 447.01,2207.01 J1.7@430.83,2207.01 432.83,2205 v1(500,2205) ; R20.2@665,2754.53 v1(665,2795)
  Bottom Layer w10: v1(500,2205) 665,2370 v1(665,2795)
NETLIGHT: Q5.1 U1.50 U3.21 | length 1567.8
  Top Layer w10: U3.21@733.43,3986.81 733.43,4038.43 755,4060 v2(1140,4060) 1242.6,4060 1277.6,4095 Q5.1@1277.6,4133.66 ; U1.50@1026.22,4911.1 1026.22,4878.78 1065,4840 v1(1085,4840)
  Bottom Layer w10: v1(1085,4840) 1140,4785 v2(1140,4060)
NetQ1_3: Q1.3 R3.1 | length 162.2
  Top Layer w10: R3.1@154.53,5495 293.66,5495 Q1.3@310,5478.66
NetQ9_1: Q9.1 Q9.3 Q10.1 R31.2 | length 399.1
  Top Layer w10: R31.2@1170,1379.53 1216.53,1379.53 Q10.1@1248.66,1347.4 1280,1316.06 1280,1190 1262.4,1172.4 Q9.1@1248.66,1172.4 1286.06,1135 Q9.3@1331.34,1135
NetR12_2: R12.2 U3.3 | length 163.6
  Top Layer w10: U3.3@241.3,2904.13 241.3,2788.23 R12.2@275,2754.53
NetR29_2: R29.2 U6.11 | length 200.6
  Top Layer w10: R29.2@205,1009.53 224.53,1009.53 297.6,1082.6 U6.11@375.35,1082.6
NetR35_2: R35.2 U7.15 | length 98.4
  Top Layer w10: U7.15@1095.16,5921.1 1095.16,5960.16 1105,5970 R35.2@1105,6015.47
NetR36_1: R36.1 U7.12@1161.1,5894.53 | length 91.4
  Top Layer w10: U7.12@1161.1,5894.53 1244.06,5894.53 R36.1@1250,5900.47
NetR37_1: R37.1 U7.14 | length 115.1
  Top Layer w10: U7.14@1114.84,5921.1 1114.84,5944.84 1165,5995 R37.1@1165,6015.47
NetR38_1: R38.1 U7.1 | length 163.2
  Top Layer w10: R38.1@980,6015.47 980,5940 1025.47,5894.53 U7.1@1048.9,5894.53
NetR39_1: R39.1 U7.16 | length 113.2
  Top Layer w10: R39.1@1050,6015.47 1040,6005.47 1040,5985 1075.47,5949.53 U7.16@1075.47,5921.1
NSS0/EINT10/GPG2: P3.4 U1.74 | length 397.9
  Top Layer w10: U1.74@1087.24,5424.88 1189.88,5424.88 1270,5505 1270,5595 P3.4@1335,5660
P1_3: U1.20
P1_4: U1.21
P1_5: U1.22
P1_6: U1.23
P2_1: R7.1 S1.1 U1.26 | length 249.9
  Top Layer w10: U1.26@553.78,4911.1 553.78,4736.22 575,4715 S1.1@575,4670
P2_2: U1.27
P2_3: U1.28
P2_4: U1.29
P2_5: U1.30
P2_6: U1.31
P2_7: U1.32
P3_0: U1.33
P3_1: U1.34
P3_2: U1.35
P3_3: U1.36
P3_4: R11.2 U1.39 | length 2748.6
  Top Layer w10: v1(200,2655) R11.2@200,2695.47 ; U1.39@809.68,4911.1 809.68,4969.68 v1(830,4990)
  Bottom Layer w10: v1(200,2655) 860,3315 860,4960 v1(830,4990)
P3_5: R10.2 U1.40 | length 2588.3
  Top Layer w10: v1(125,2655) R10.2@125,2695.47 ; v1(829.37,4845.63) U1.40@829.37,4911.1
  Bottom Layer w10: v1(125,2655) 829.37,3359.37 v1(829.37,4845.63)
P3_6: U1.41
P3_7: U1.42
P4_3: U1.46
P4_4: U1.47
P4_6: U1.49
P5_1: U1.10
P5_6: R27.2 U1.53 | length 3231.8
  Top Layer w10: U1.53@1087.24,5011.5 1148.5,5011.5 v1(1175,4985) ; R27.2@1250,1899.53 v1(1250,1940)
  Bottom Layer w10: v1(1175,4985) 1270,4890 1270,1960 v1(1250,1940)
P5_7: R26.2 U1.54 | length 3286.7
  Top Layer w10: U1.54@1087.24,5031.18 v1(1183.82,5031.18) ; R26.2@1325,1899.53 v1(1325,1940)
  Bottom Layer w10: v1(1183.82,5031.18) 1290,4925 1290,1975 v1(1325,1940)
P6_0: U1.97
P6_1: U1.98 U2.1 | length 756.5
  Top Layer w10: U2.1@112.76,5745.87 75.87,5745.87 60,5730 60,5650 80,5630 510,5630 593.15,5546.85 U1.98@593.15,5505.59
P6_2: U1.99
P6_3: Q1.1 U1.100 | length 250.3
  Top Layer w10: Q1.1@347.4,5561.34 533.66,5561.34 553.78,5541.22 U1.100@553.78,5505.59
P6_4: R2.1 R3.2 U1.1 | length 512.6
  Top Layer w10: R2.1@95.47,5570 R3.2@95.47,5495 95.47,5489.53 125,5460 255,5460 290,5425 410,5425 429.57,5444.57 U1.1@492.76,5444.57
P6_5: U1.2
P6_6: U1.3
P6_7: U1.4
P7_4: U1.5
P7_5: U1.6
P7_6: U1.7
P7_7: U1.8
P8_2: U1.59
P8_3: U1.60
P8_4: U1.61
P8_5: U1.65
P8_6: U1.66
P8_7: U1.67
P9_0: U1.68
P9_1: P3.1 U1.69 | length 261.7
  Top Layer w10: U1.69@1087.24,5326.46 1246.46,5326.46 1280,5360 P3.1@1335,5360
P9_2: P3.2 U1.70 | length 294.9
  Top Layer w10: U1.70@1087.24,5346.14 1216.14,5346.14 1330,5460 P3.2@1335,5460
P9_3: P3.3 U1.71 | length 363.3
  Top Layer w10: U1.71@1087.24,5365.83 1180.83,5365.83 1288.78,5473.78 1288.78,5533.78 1315,5560 P3.3@1335,5560
P9_4: U1.72
P9_5: U1.73
P9_7: U1.75
P10_0: U1.76
P10_1: U1.77
P10_2: U1.78
P10_3: U1.79
P10_4: U1.80
P10_5: U1.81
P10_6: U1.82
P10_7: U1.83
P11_0: U1.84
P11_1: U1.85
P11_2: U1.86
P\G\O\O\D\: U1.17 U7.7 电源.2 | length 994.6
  Top Layer w10: U1.17@492.76,5129.61 v1(564.61,5129.61) ; v1(1045,5720) 1048.5,5723.5 1075,5723.5 1114.84,5763.35 U7.7@1114.84,5808.9
  Bottom Layer w10: v1(564.61,5129.61) 1045,5610 v1(1045,5720)